# Altium PCB Counter_of_area.PcbDoc
Units mm, origin at the board's own origin, x right, y up, seen from the top; angles counter-clockwise.
Board outline 63 x 62.5 mm, 2 copper layers (Top Layer, Bottom Layer); 28 components, 36 nets, 115 pads, 21 vias.
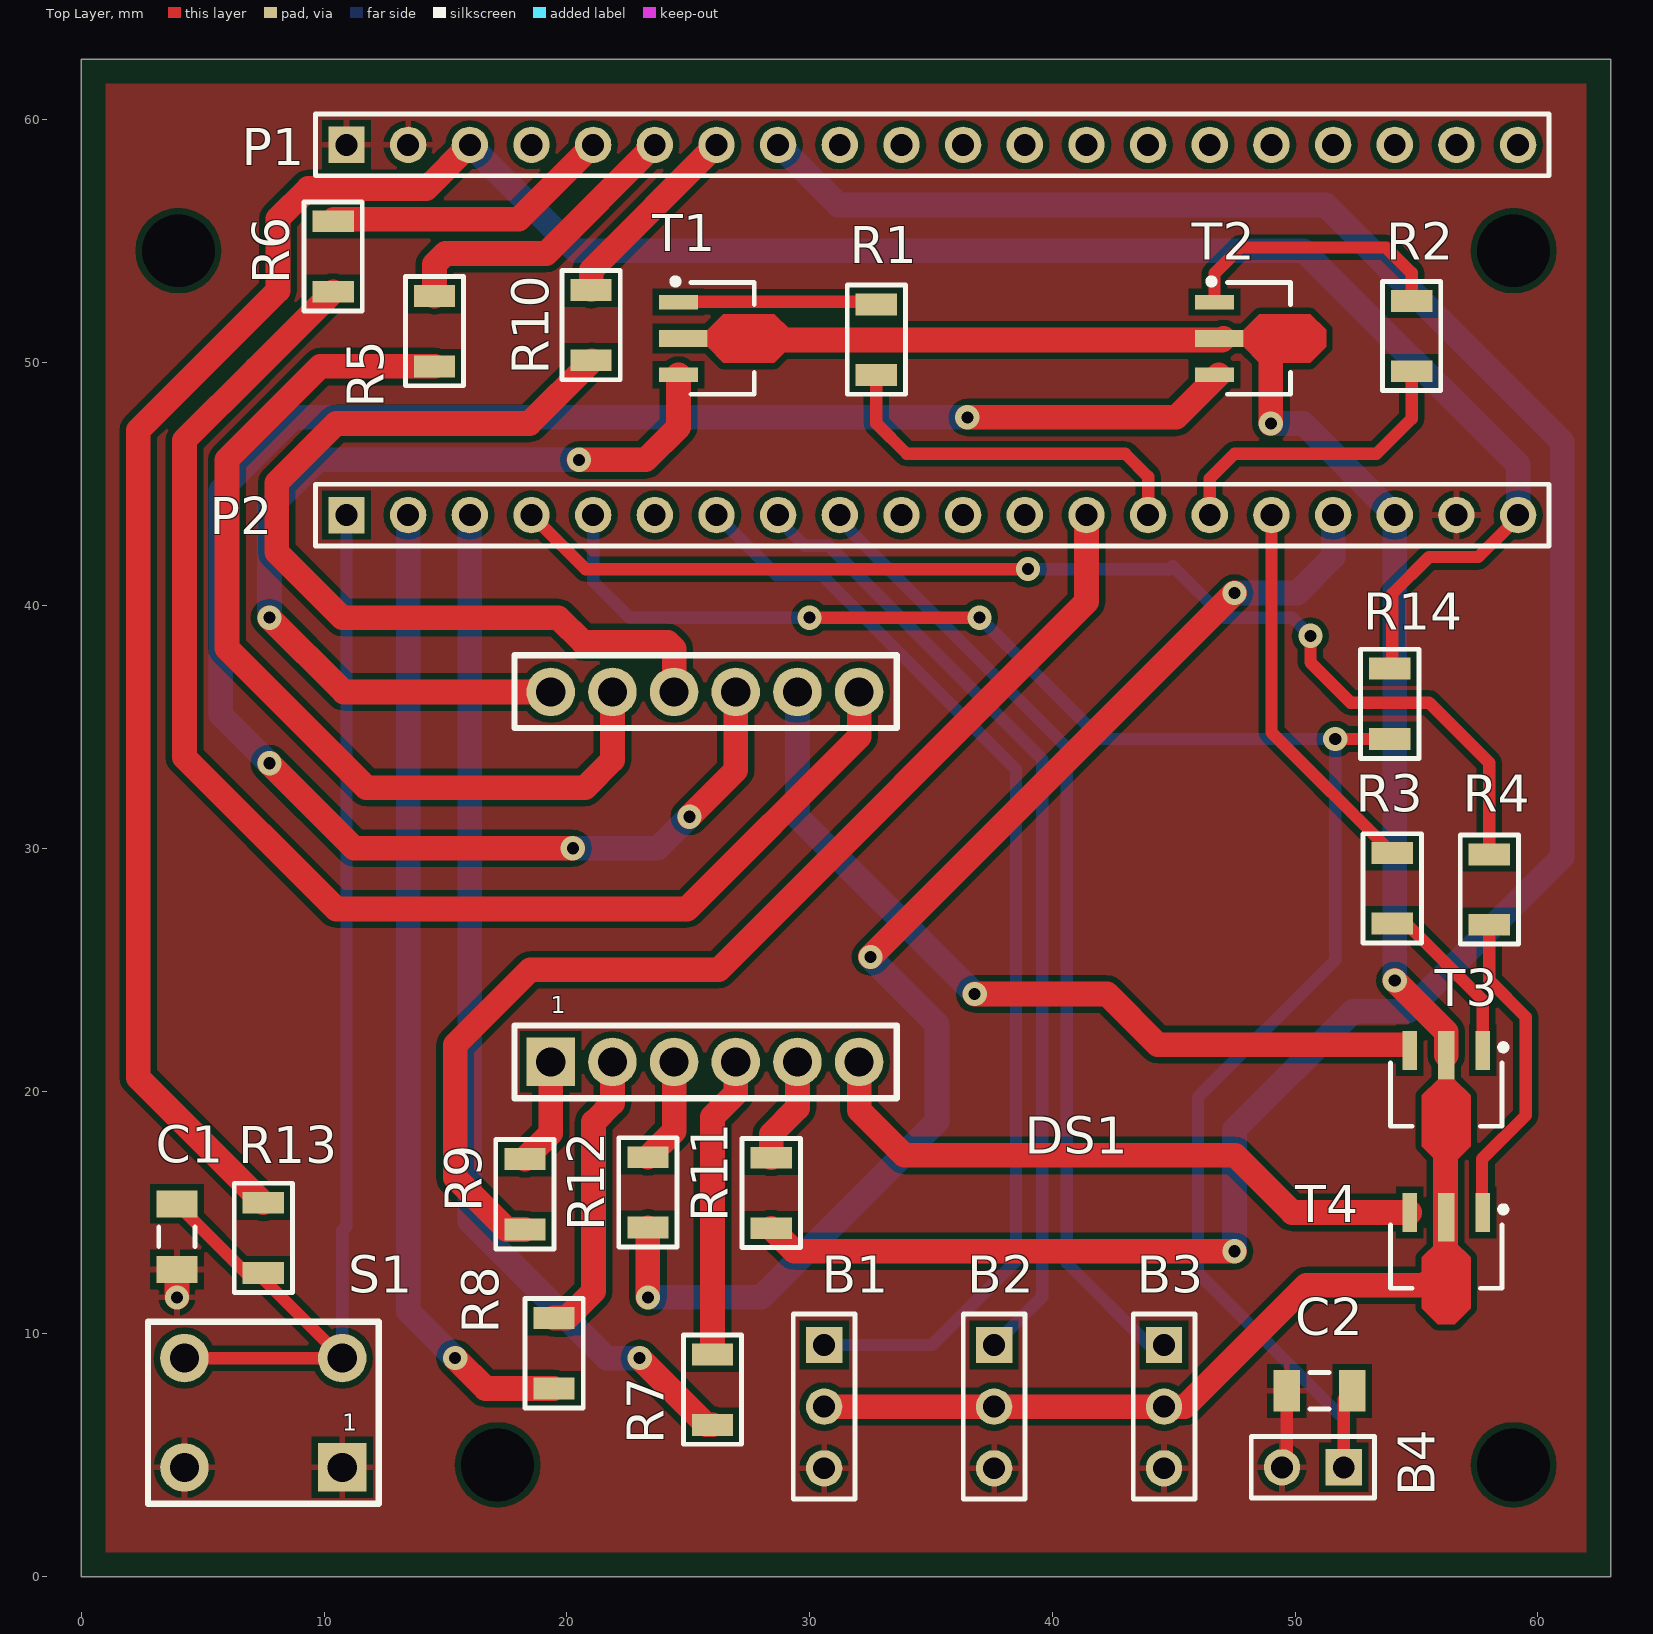
[diagram p0: Top Layer view]
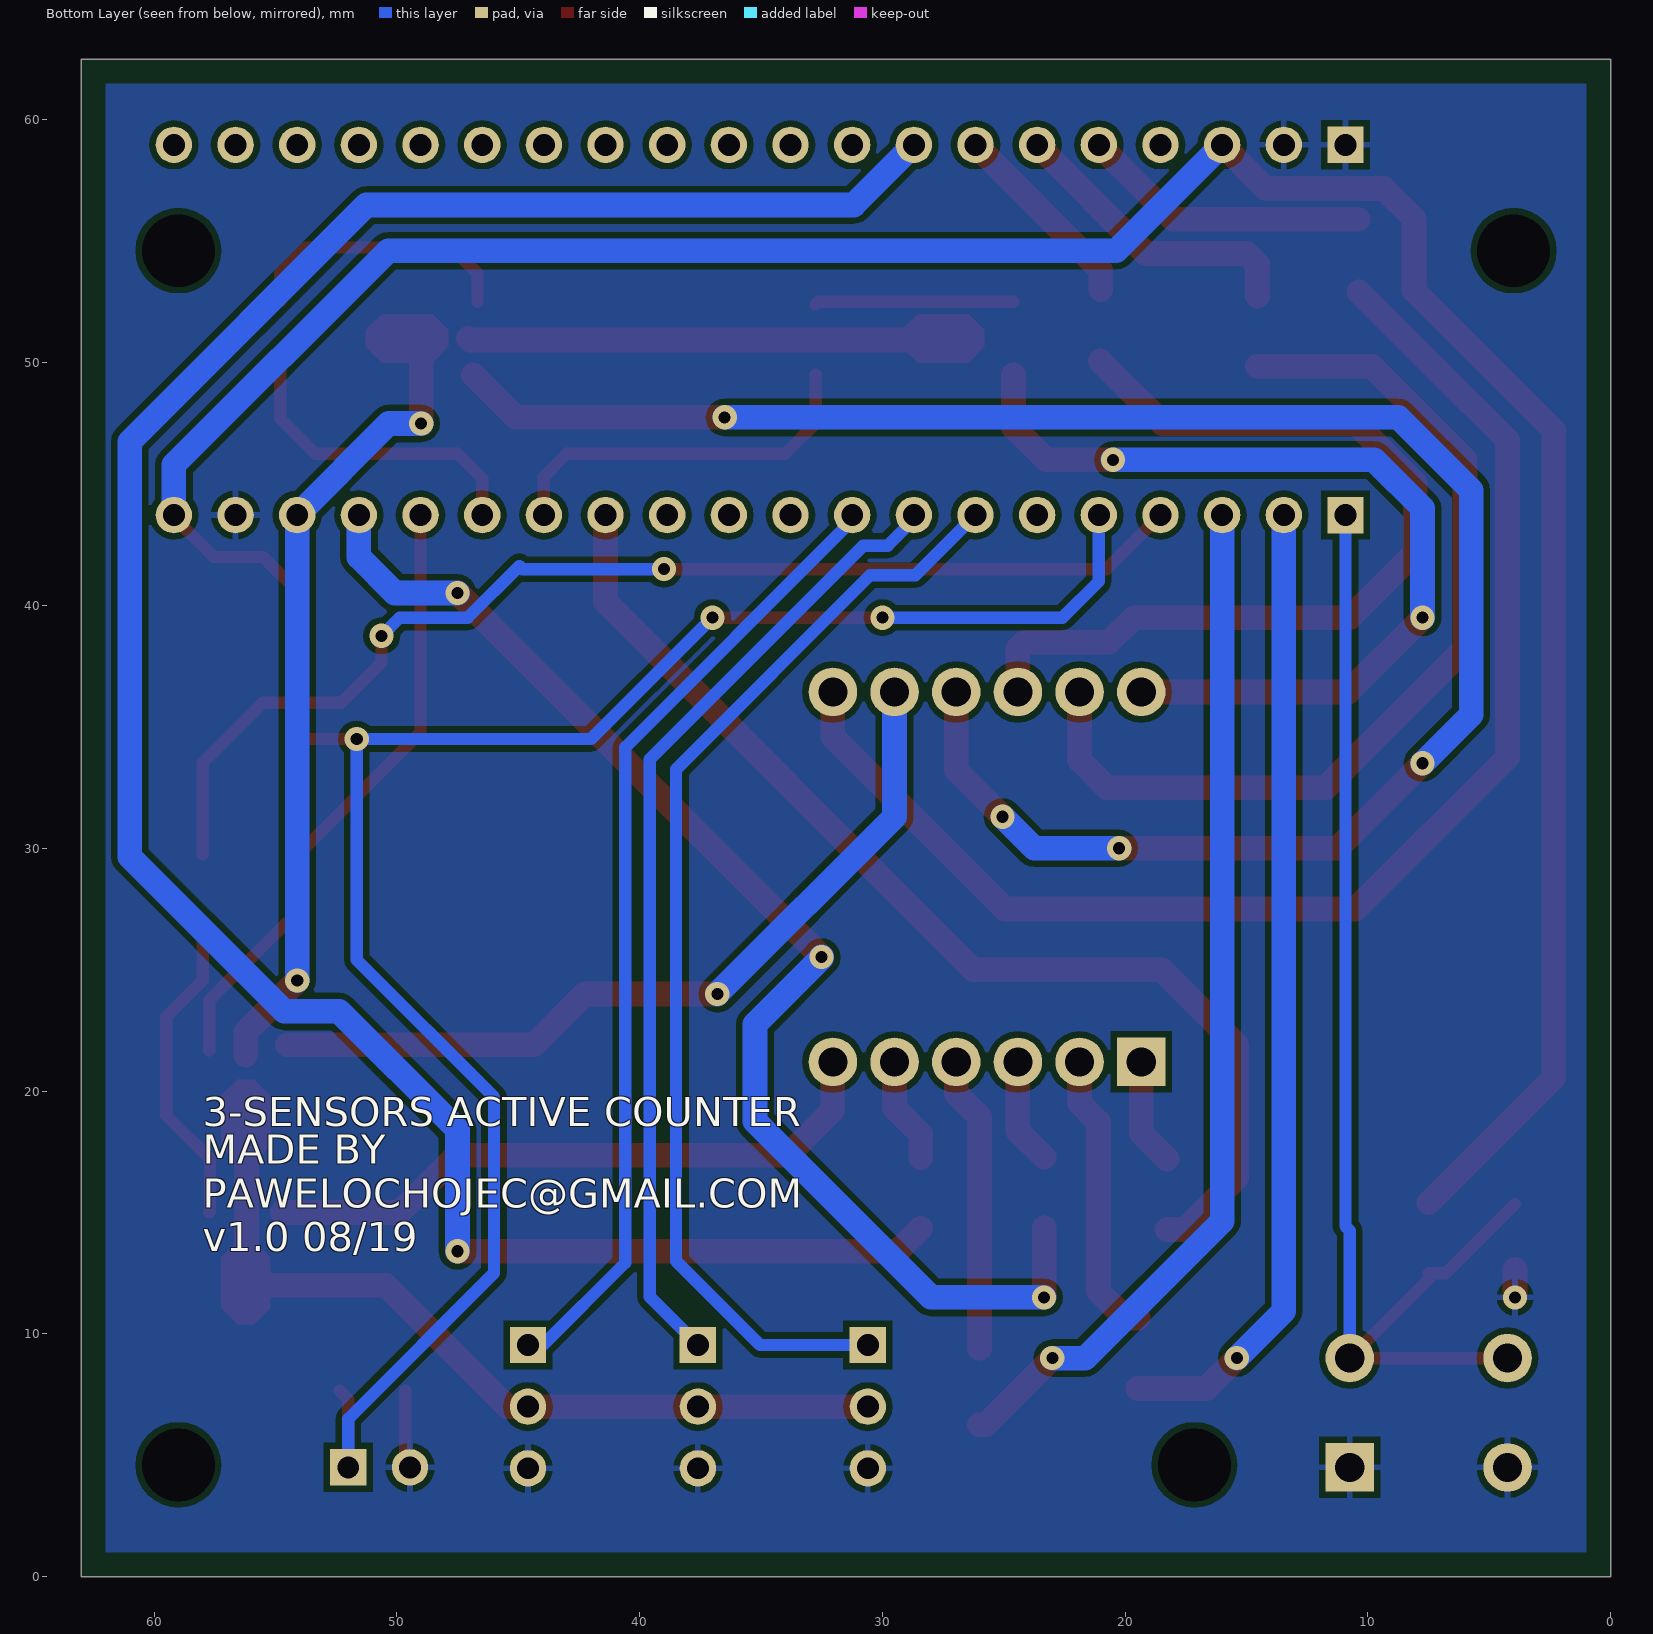
[diagram p1: Bottom Layer view, seen from below]
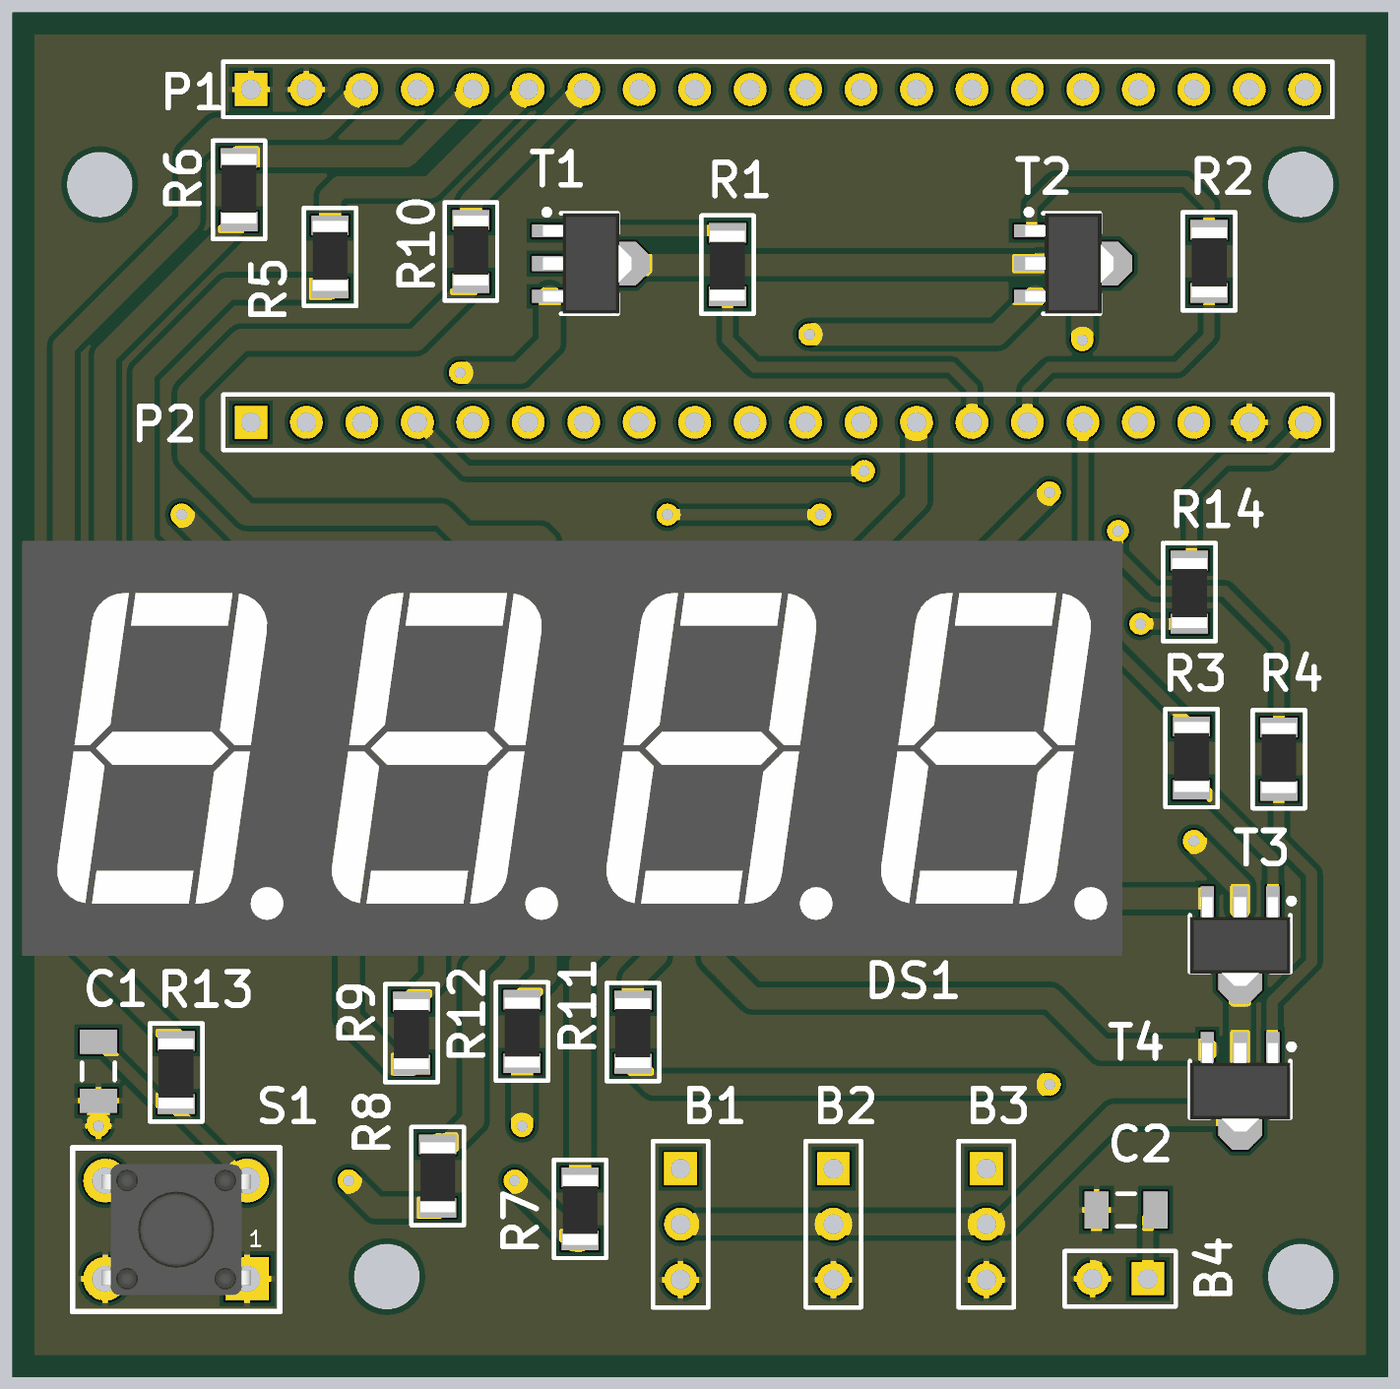
[diagram p2: 3D render of the assembled board from above, using the file's embedded part models]

## Layer stack, top to bottom
Top Solder: solder mask 0.0102, Solder Resist, Dk 3.5
Top Layer: signal copper 0.0356
Dielectric 1: dielectric 0.32, FR-4, Dk 4.8
Bottom Layer: signal copper 0.0356
Bottom Solder: solder mask 0.0102, Solder Resist, Dk 3.5

## Board outline
0,0 63,0 63,62.5 0,62.5

## Design rules (kind name [scope] priority, off if disabled: settings)
Clearance [All] p1: gap=0.254 ignorepadtopadclearanceinfootprint=FALSE except(0: Arc-Hole Track-Hole SMDPad-Hole THPad-Hole Via-Hole Fill-Hole Poly-Hole Region-Hole Text-Hole)
HoleSize [All] p1: absolutevalues=TRUE maxlimit=3.5 minlimit=0.025 maxpercent=80.000 minpercent=20.000
HoleToHoleClearance [All] p1: gap=0.25 allowstackedmicrovias=TRUE
PolygonConnect [All] p1: connectstyle=Relief reliefconductorwidth=0.254 reliefentries=4 polygonreliefangle="90 Angle" airgapwidth=0.254
RoutingVias [All] p1: holewidth=0.711 width=1.27 viastyle="Through Hole" minholewidth=0.711 minwidth=1.27 maxholewidth=0.711 maxwidth=1.27
SilkToSilkClearance [All] p1: silktosilkclearance=0.25
SilkToSolderMaskClearance [IsPad] p1: minsilkscreentomaskgap=0.24 clearancetoexposedcopper=TRUE
SolderMaskExpansion [All] p1: expansion=0.102
Width [All] p1: maxlimit=1.016 minlimit=0.254 preferedwidth=0.508
26 further rules are at their usual default settings.

## Classes and differential pairs
net class seg[1..8]: seg1 seg2 seg3 seg4 seg5 seg6 seg7 seg8
net class K[1..4]: K1 K2 K3 K4
net class digit[1..4]: digit1 digit2 digit3 digit4
net class Base[1..4]: Base1 Base2 Base3 Base4

## Components (designator, comment, footprint, x,y, rotation, side; value= is the part's Value field where it differs from the comment)
B1 "Header 3" HDR1X3 30.6,9.54 r270 top
B2 "Header 3" HDR1X3 37.6,9.54 r270 top
B3 "Header 3" HDR1X3 44.6,9.54 r270 top
B4 "Header 2" HDR1X2 52,4.5 r180 top
C1 "Cap Semi" C1206 3.94,14 r90 top value=100nF
C2 "Cap Semi" C1206 51,7.65 r0 top value=100nF
DS1 "KW4-561AGB" 7SEGMENT4DIGITS 19.34,21.2 r0 top
P1 "Header 20" HDR1X20 10.925,58.975 r0 top
P2 "Header 20" HDR1X20 10.925,43.725 r0 top
R1 "1206 resistor" "RESISTOR 1206" 32.75,51 r90 top
R2 "1206 resistor" "RESISTOR 1206" 54.8,51.15 r90 top
R3 "1206 resistor" "RESISTOR 1206" 54,28.3 r270 top
R4 "1206 resistor" "RESISTOR 1206" 58,28.25 r270 top
R5 "1206 resistor" "RESISTOR 1206" 14.55,51.25 r270 top
R6 "1206 resistor" "RESISTOR 1206" 10.375,54.325 r270 top
R7 "1206 resistor" "RESISTOR 1206" 26,7.75 r90 top
R8 "1206 resistor" "RESISTOR 1206" 19.475,9.25 r90 top
R9 "1206 resistor" "RESISTOR 1206" 18.275,15.8 r90 top
R10 "1206 resistor" "RESISTOR 1206" 21,51.5 r270 top
R11 "1206 resistor" "RESISTOR 1206" 28.42,15.85 r90 top
R12 "1206 resistor" "RESISTOR 1206" 23.34,15.875 r90 top
R13 "1206 resistor" "RESISTOR 1206" 7.5,14 r90 top
R14 "1206 resistor" "RESISTOR 1206" 53.899,36 r90 top
S1 "pushbutton" "TACT SWITCH" 7.25,7 r0 top
T1 "BCX51-16.115" SOT89-150P410X160-3M 26.5,51 r0 top
T2 "BCX51-16.115" SOT89-150P410X160-3M 48.58,51 r0 top
T3 "BCX51-16.115" SOT89-150P410X160-3M 56.225,19.775 r270 top
T4 "BCX51-16.115" SOT89-150P410X160-3M 56.225,13.1 r270 top

## Footprints (in the part's own frame and the unit in brackets; to place one, negate y for a bottom-side part, rotate by r counter-clockwise, add the part's x,y. Pads: shape width x height; smd on the part's side, far side on the other; paste and mask are expansions set on the pad)
7SEGMENT4DIGITS [mm]
  rect 2x2 hole 1.2: 1(0,0)
  round 2 hole 1.2: 2(2.54,0) 3(5.08,0) 4(7.62,0) 5(10.16,0) 6(12.7,0) 7(12.7,15.24) 8(10.16,15.24) 9(7.62,15.24) 10(5.08,15.24) 11(2.54,15.24) 12(0,15.24)
  silkscreen extent -1.5,-1.5 14.25,16.75, body extent -18.9,-1.9 31.5,17.1, height 8
C1206 [mm] "Chip Capacitor, Body 3.2x1.6mm, IPC High Density"
  rect 1.1x1.7 smd: 1(-1.35,0) 2(1.35,0)
  silkscreen extent -0.4,-0.75 0.4,0.75, body extent -1.7,-0.9 1.7,0.9, height 1.3
HDR1X2 [mm] "Connector; Header; 2 Position"
  rect 1.5x1.5 hole 0.9: 1(0,0)
  round 1.5 hole 0.9: 2(2.54,0)
  silkscreen extent -1.27,-1.27 3.81,1.27
HDR1X3 [mm] "Connector; Header; 3 Position"
  rect 1.5x1.5 hole 0.9: 1(0,0)
  round 1.5 hole 0.9: 2(2.54,0) 3(5.08,0)
  silkscreen extent -1.27,-1.27 6.35,1.27
HDR1X20 [mm] "Connector; Header; 20 Position"
  rect 1.5x1.5 hole 0.9: 1(0,0)
  round 1.5 hole 0.9: 2(2.54,0) 3(5.08,0) 4(7.62,0) 5(10.16,0) 6(12.7,0) 7(15.24,0) 8(17.78,0) 9(20.32,0) 10(22.86,0) 11(25.4,0) 12(27.94,0) 13(30.48,0) 14(33.02,0) 15(35.56,0) 16(38.1,0) 17(40.64,0) 18(43.18,0) 19(45.72,0) 20(48.26,0)
  silkscreen extent -1.27,-1.27 49.53,1.27
"RESISTOR 1206" [mm]
  rect 0.9x1.7 smd: 1(-1.5,0) 2(1.4,0)
  silkscreen extent -2.3,-1.2 2.2,1.2, body extent -1.7,-0.8 1.5,0.8, height 0.61
SOT89-150P410X160-3M [mm] "SOT89, 3-Leads, Body 4,50x2,45mm, Pitch 1,50mm, Lead Span 4,1mm, IPC Low Density"
  rect 1.6x0.6 smd: B(-1.9,1.5) E(-1.9,-1.5)
  rect 2x0.7 smd: C(-1.7,0)
  Top Layer region: -0.7,0.35 -0.05,1 2.05,1 2.7,0.35 2.7,-0.35 2.05,-1 -0.05,-1 -0.7,-0.35
  silkscreen extent -2.15,-2.3 1.22,2.47, body extent -2.2,-2.3 1.85,2.3, height 1.6
"TACT SWITCH" [mm] "6x6mm tact switch"
  rect 2x2 hole 1.2: 1(3.5,-2.5)
  round 2 hole 1.2: 2(-3,-2.5) 3(3.5,2) 4(-3,2)
  silkscreen extent -4.5,-4 5,3.5, body extent -3.17,-3.25 3.67,2.75, height 5.01

## Part data
B1 B2 B3: "Header, 3-Pin", LatestRevisionDate=17-Jul-2002, LatestRevisionNote="Re-released for DXP Platform.", Publisher="Altium Limited"
B4: "Header, 2-Pin", LatestRevisionDate=17-Jul-2002, LatestRevisionNote="Re-released for DXP Platform.", Publisher="Altium Limited"
C1 C2: "Capacitor (Semiconductor SIM Model)", LatestRevisionDate=29-May-2009, LatestRevisionNote="IPC-7351 Footprint Added.", PackageDescription="Chip Capacitor", PackageReference=C1206, Published=8-Jun-2000, Publisher="Altium Limited"
DS1: library part FYQ-5641AUHR-21, "7 segment, 4 digit display", Manufacturer=Foryard, Manufacturer Part Number=FYQ-5641AUHR-21, Pricing 1="1=1.32, 5=0.88, 35=0.73, 175=0.64, 630=0.59 (USD)", Stock 1=641, Supplier 1=TME, Supplier Part Number 1=FYQ-5641AUHR-21
P1 P2: "Header, 20-Pin", LatestRevisionDate=17-Jul-2002, LatestRevisionNote="Re-released for DXP Platform.", Publisher="Altium Limited"
R1 R2 R3 R4: library part CRCW1206220RJNTABC, "Resistor: thick film; SMD; 1206; 220O; 0.25W; ±5%; -55÷125°C", Case/Package=1206, Manufacturer=Vishay, Power Rating=250mW, Resistance=1k, Tolerance=5%, Lead Free="Contains Lead", Manufacturer Part Number=CRCW1206220RJNTABC, Pricing 1="100=0.0314, 500=0.01833, 1000=0.01178, 5000=0.005, 15000=0.00487 (USD)", Stock 1=277400, Supplier 1=TME, Supplier Part Number 1=CRCW1206220RJNTABC
R5 R6 R7 R8 R9 R10 R11 R12: library part CRCW1206220RJNTABC, "Resistor: thick film; SMD; 1206; 220O; 0.25W; ±5%; -55÷125°C", Case/Package=1206, Manufacturer=Vishay, Power Rating=250mW, Resistance=220R, Tolerance=5%, Lead Free="Contains Lead", Manufacturer Part Number=CRCW1206220RJNTABC, Pricing 1="100=0.0314, 500=0.01833, 1000=0.01178, 5000=0.005, 15000=0.00487 (USD)", Stock 1=277400, Supplier 1=TME, Supplier Part Number 1=CRCW1206220RJNTABC
R13 R14: library part CRCW1206220RJNTABC, "Resistor: thick film; SMD; 1206; 220O; 0.25W; ±5%; -55÷125°C", Case/Package=1206, Manufacturer=Vishay, Power Rating=250mW, Resistance=10k, Tolerance=5%, Lead Free="Contains Lead", Manufacturer Part Number=CRCW1206220RJNTABC, Pricing 1="100=0.0314, 500=0.01833, 1000=0.01178, 5000=0.005, 15000=0.00487 (USD)", Stock 1=277400, Supplier 1=TME, Supplier Part Number 1=CRCW1206220RJNTABC
S1: library part B3F-1000, "OMRON ELECTRONIC COMPONENTS         B3F-1000             Tactile Switch, Non Illuminated, 24 V, 50 mA, 0.98 N, Solder, B3F Series", Contact Current Rating=50mA, Contact Resistance=100mR, Insulation Resistance=100MR, Manufacturer=Omron, Max Operating Temperature=70°C, Max Voltage Rating (DC)=24V, Min Operating Temperature=-25°C, Operating Force=0.98N, Package Quantity=1500, Actuator Length=0.9mm, Actuator Type=Standard, ComponentLink1Description=http://www.farnell.com/datasheets/2082873.pdf?src-supplier=Newark, ComponentLink1URL=http://www.farnell.com/datasheets/2082873.pdf?src-supplier=Newark, ComponentLink2Description=http://www.farnell.com/datasheets/2082873.pdf?src-supplier=Element14, ComponentLink2URL=http://www.farnell.com/datasheets/2082873.pdf?src-supplier=Element14, ComponentLink3Description=https://omronfs.omron.com/en_US/ecb/products/pdf/en-b3f.pdf?src-supplier=Digi-Key, ComponentLink3URL=https://omronfs.omron.com/en_US/ecb/products/pdf/en-b3f.pdf?src-supplier=Digi-Key, ComponentLink4Description=https://www.distrelec.biz/Web/Downloads/he/et/B3F_eng_datasheet.pdf?mime=application%2Fpdf&src-supplier=Distrelec, ComponentLink4URL=https://www.distrelec.biz/Web/Downloads/he/et/B3F_eng_datasheet.pdf?mime=application%2Fpdf&src-supplier=Distrelec, ComponentLink5Description=http://www.onlinecomponents.com/productFiles/mf-OM/en-b3f.pdf?src-supplier=Onlinecomponents.com, ComponentLink5URL=http://www.onlinecomponents.com/productFiles/mf-OM/en-b3f.pdf?src-supplier=Onlinecomponents.com, ComponentLink6Description=http://www.mouser.com/ds/2/307/B3F_0811-26083.pdf?src-supplier=Mouser, ComponentLink6URL=http://www.mouser.com/ds/2/307/B3F_0811-26083.pdf?src-supplier=Mouser, ComponentLink7Description=http://www.jameco.com/Jameco/Products/ProdDS/162886.pdf?src-supplier=Jameco, ComponentLink7URL=http://www.jameco.com/Jameco/Products/ProdDS/162886.pdf?src-supplier=Jameco, ComponentLink8Description=https://www.alliedelec.com/m/d/0b4640ec13fd80eb1780b1c20343ca8a.pdf?src-supplier=Allied+Electronics, ComponentLink8URL=https://www.alliedelec.com/m/d/0b4640ec13fd80eb1780b1c20343ca8a.pdf?src-supplier=Allied+Electronics, ComponentLink9Description=https://www.verical.com/server-webapp/html/getDatasheet?partID=388862&src-supplier=Verical, ComponentLink9URL=https://www.verical.com/server-webapp/html/getDatasheet?partID=388862&src-supplier=Verical, ComponentLink10Description=http://www.rapidonline.com/pdf/78-0136.pdf?src-supplier=Rapid+Electronics, ComponentLink10URL=http://www.rapidonline.com/pdf/78-0136.pdf?src-supplier=Rapid+Electronics, Contact Material=Gold,Silver, Contact Plating=Gold, Current Rating=50mA, Depth=6mm, Electrical Life=1000000Cycles, Height=3.4mm, Illumination Type=Non-Illuminated,Illuminated, Lead Free="Lead Free", Length=6mm, Manufacturer Part Number=B3F-1000, Max Current Rating=50mA, Mechanical Life=1000000Cycles, Mount="Through Hole", Number of Pins=4, Number of Poles=1, Orientation=Straight, Packaging=Bag, Pricing 1="1=0.1397, 20=0.1319, 100=0.1241, 500=0.1186, 1000=0.11 (USD)", REACH SVHC=Unknown, Stock 1=6551, Supplier 1=TME, Supplier Part Number 1=B3F-1000, Switch Function=Off-Mom, Switch Travel=0.25mm, Termination="PC Pins", Throw Configuration=SPST, Voltage Rating (DC)=24V, Weight=0.008818oz, Width=6mm
T1 T2 T3 T4: "TRANS PNP 400V 0.5A SOT89", Forward Voltage=1.2V, Manufacturer="NXP Semiconductors", Manufacturer Part Number=BCX51-16115, Supplier Part Number 1=771-BCX51-16115, ComponentLink1Description=https://www.diodes.com/assets/Datasheets/2DA1971.pdf?src-supplier=Digi-Key, ComponentLink1URL=https://www.diodes.com/assets/Datasheets/2DA1971.pdf?src-supplier=Digi-Key, ComponentLink2Description=https://www.verical.com/server-webapp/html/getDatasheet?partID=661243&src-supplier=Verical, ComponentLink2URL=https://www.verical.com/server-webapp/html/getDatasheet?partID=661243&src-supplier=Verical, ComponentLink3Description=http://www.mouser.com/ds/2/115/2DA1971-219201.pdf?src-supplier=Mouser, ComponentLink3URL=http://www.mouser.com/ds/2/115/2DA1971-219201.pdf?src-supplier=Mouser, Lead Free="Lead Free", Number of Pins=3, Packaging="Tape and Reel", Polarity=PNP, Pricing 1="1=0.4, 10=0.284, 50=0.284, 100=0.131, 1000=0.1, 2000=0.086, 10000=0.078, 25000=0.073, 50000=0.066, 100000=0.063 (USD)", REACH SVHC="No SVHC", Stock 1=13194, Supplier 1=Mouser

## Free pads (board coordinates)
  round 2.5 hole 3 unplated: ""(4,54.615) ""(17.15,4.6) ""(59,4.6) ""(59,54.615)

## Via types
v1: diameter 1, hole 0.5, Top Layer to Bottom Layer, 21 vias

## Nets (pads, with @x,y where several pads share a name; then routed paths per layer and width w, separated by ;. In a path a pad name is that pad's centre, name@x,y a point inside that pad or via, vN(x,y) a via of type N, cw(c..) or ccw(c..) an arc to the next point about the centre after c; other vN are vias at no path point)
5V: B1.2 B2.2 B3.2 P2.18 T1.C T2.C T3.C T4.C | length 86.9
  Top Layer w1.016: 27.972,51 28.034,50.938 46.988,50.938 T2.C@47.05,51 ; B1.2@30.58,7 B1.2 B2.2 B3.2 45.46,7 50.46,12 55.35,12 56.198,12.847 56.198,19.325 ; v1(49,47.5) 49,50.998 ; v1(54.105,24.553) 56.225,22.433 T3.C
  Bottom Layer w1.016: v1(49,47.5) 50.33,47.5 P2.18 v1(54.105,24.553)
Base1: R1.2 T1.B | length 8.2
  Top Layer w0.508: T1.B 24.6,52.508 32.642,52.508 R1.2
Base2: R2.2 T2.B | length 11.3
  Top Layer w0.508: T2.B 46.68,53.68 47.75,54.75 53.75,54.75 54.8,53.7 R2.2
Base3: R3.2 T3.B | length 7.1
  Top Layer w0.508: R3.2 54.575,26.9 57.725,23.75 T3.B
Base4: R4.2 T4.B | length 13.2
  Top Layer w0.508: T4.B 57.7,15.025 57.7,17.2 59.5,19 59.5,23.053 58,24.553 R4.2
digit1: P2.14 R1.1 | length 15.7
  Top Layer w0.508: R1.1 32.75,47.5 34,46.25 43,46.25 43.945,45.305 P2.14
digit2: P2.15 R2.1 | length 12.8
  Top Layer w0.508: P2.15 46.485,45.235 47.5,46.25 53.355,46.25 54.8,47.695 R2.1
digit3: P2.16 R3.1 | length 16
  Top Layer w0.508: P2.16 49.025,34.775 R3.1
digit4: P2.4 R4.1 | length 48.2
  Top Layer w0.508: P2.4 20.77,41.5 v1(39,41.5) ; v1(50.63,38.75) 50.63,37.65 52.28,36 55.517,36 58,33.517 R4.1
  Bottom Layer w0.508: v1(39,41.5) 44.829,41.5 44.954,41.625 47.079,39.5 49.88,39.5 v1(50.63,38.75)
GND: B1.3 B2.3 B3.3 B4.2 C1.1 C2.1 P1.1 P1.2 P2.19 S1.1 S1.2 | length 4.4
  Top Layer w0.508: B4.2 49.65,4.69 C2.1
  Top Layer w1.016: v1(3.94,11.5) C1.1 ; B1.3@30.54,4.5 B1.3@30.58,4.46
K1: DS1.12 T1.E | length 37.8
  Top Layer w1.016: v1(7.75,39.5) 10.81,36.44 DS1.12 DS1.12@19.315,36.465 ; v1(20.5,46) 23.25,46 24.6,47.35 T1.E
  Bottom Layer w1.016: v1(7.75,39.5) 7.75,44 9.75,46 v1(20.5,46)
K2: DS1.9 T2.E | length 80.4
  Top Layer w1.016: v1(7.75,33.5) 11.25,30 v1(20.25,30) ; v1(25.05,31.3) 26.96,33.21 DS1.9 ; v1(36.5,47.75) 45.1,47.75 T2.E@46.85,49.5
  Bottom Layer w1.016: v1(7.75,33.5) 5.75,35.5 5.75,44.75 8.75,47.75 v1(36.5,47.75) ; v1(20.25,30) 23.75,30 v1(25.05,31.3)
K3: DS1.8 T3.E | length 34
  Top Layer w1.016: v1(36.8,24) 42.25,24 44.337,21.913 T3.E@54.517,21.913
  Bottom Layer w1.016: DS1.8 29.5,31.3 v1(36.8,24)
K4: DS1.6 T4.E | length 26.4
  Top Layer w1.016: DS1.6 32.04,19.21 33.9,17.35 47.525,17.35 49.875,15 T4.E
NetB1_1: B1.1 P2.7 | length 46.3
  Bottom Layer w0.508: P2.7 28.64,41.25 30.5,41.25 38.5,33.25 38.5,13 35.04,9.54 B1.1 B1.1@30.58,9.54
NetB2_1: B2.1 P2.8 | length 40.3
  Bottom Layer w0.508: P2.8 29,43.725 29,43.25 29.783,42.467 30.783,42.467 39.58,33.67 39.58,11.52 B2.1
NetB3_1: B3.1 P2.9 | length 40.2
  Bottom Layer w0.508: P2.9 31.5,43.725 31.5,43.25 40.593,34.157 40.593,12.927 43.98,9.54 B3.1
NetDS1_1: DS1.1 R9.2 | length 4.4
  Top Layer w1.016: R9.2 19.34,18.265 DS1.1
NetDS1_2: DS1.2 R8.2 | length 11.9
  Top Layer w1.016: R8.2 20.002,10.65 21.102,11.75 21.102,18.722 21.88,19.5 DS1.2
NetDS1_3: DS1.3 R12.2 | length 4.4
  Top Layer w1.016: R12.2 24.42,18.355 DS1.3
NetDS1_4: DS1.4 R7.2 | length 12.2
  Top Layer w1.016: R7.2@26,9.4 26,18.94 26.96,19.9 DS1.4
NetDS1_5: DS1.5 R11.2 | length 4.4
  Top Layer w1.016: R11.2 28.42,18.22 29.5,19.3 DS1.5
NetDS1_7: DS1.7 R6.2 | length 56.9
  Top Layer w1.016: R6.2 7.2,49.75 4.25,46.8 4.25,33.75 10.5,27.5 24.95,27.5 32.04,34.59 DS1.7
NetDS1_10: DS1.10 R10.2 | length 38.1
  Top Layer w1.016: R10.2@21.031,50.069 18.462,47.5 10.5,47.5 8.055,45.055 8.055,42.195 10.75,39.5 19.653,39.5 20.669,38.484 24.161,38.484 24.42,38.225 DS1.10 DS1.10@24.161,36.699
NetDS1_11: DS1.11 R5.2 | length 39.4
  Top Layer w1.016: R5.2 9.85,49.85 6,46 6,38.25 11.75,32.5 20.75,32.5 21.88,33.63 DS1.11
"position signal": B4.1 C2.2 P2.5 R14.1 | length 76.4
  Top Layer w0.508: v1(30,39.5) v1(37,39.5) ; v1(51.655,34.5) R14.1 ; B4.1 52,7.3 C2.2
  Bottom Layer w0.508: P2.5 21.085,41 22.585,39.5 v1(30,39.5) ; v1(37,39.5) 42,34.5 v1(51.655,34.5) 51.655,25.405 46,19.75 46,12.5 52,6.5 B4.1
pushbutton: C1.2 P2.1 R13.1 S1.3 S1.4 | length 50.9
  Top Layer w0.508: C1.2 6.79,12.5 R13.1 7.5,12.25 S1.3 S1.4
  Bottom Layer w0.508: S1.3 10.75,14.25 10.925,14.425 P2.1
seg1: P1.6 R5.1 | length 12.4
  Top Layer w1.016: R5.1 14.55,54.05 15,54.5 19.15,54.5 P1.6
seg2: P1.5 R6.1 | length 12
  Top Layer w1.016: R6.1@10.405,55.905 18.015,55.905 P1.5
seg3: P2.3 R7.1 | length 42.6
  Top Layer w1.016: v1(23,9) 25.75,6.25 R7.1
  Bottom Layer w1.016: P2.3 16.005,14.645 21.65,9 v1(23,9)
seg4: P2.2 R8.1 | length 40.1
  Top Layer w1.016: v1(15.4,9) 16.65,7.75 R8.1
  Bottom Layer w1.016: P2.2 13.465,11.699 13.465,10.935 v1(15.4,9)
seg5: P2.13 R9.1 | length 46.4
  Top Layer w1.016: R9.1 17.53,14.3 15.4,16.43 15.4,21.9 18.5,25 26.25,25 41.405,40.155 P2.13
seg6: P1.7 R10.1 | length 8.1
  Top Layer w1.016: R10.1 21,53.81 P1.7
seg7: P1.8 R11.1 | length 97.1
  Top Layer w1.016: R11.1 29.37,13.4 v1(47.5,13.4)
  Bottom Layer w1.016: P1.8 31.18,56.5 51.25,56.5 61,46.75 61,29.652 54.631,23.283 52.383,23.283 47.5,18.4 v1(47.5,13.4)
seg8: P2.17 R12.1 | length 53.3
  Top Layer w1.016: v1(23.34,11.5) R12.1 ; v1(32.509,25.525) v1(47.5,40.516)
  Bottom Layer w1.016: v1(23.34,11.5) 28,11.5 35.25,18.75 35.25,22.75 32.509,25.491 v1(32.509,25.525) ; v1(47.5,40.516) 50.081,40.516 51.565,42 P2.17
VCC: P1.3 P2.20 R13.2 R14.2 | length 114.8
  Top Layer w0.508: R14.2@54,37.39 54,40.483 55.517,42 57.545,42 58.846,43.301 59.185,43.301 P2.20
  Top Layer w1.016: R13.2 2.35,20.55 2.35,47.223 8.1,52.973 8.1,55.928 9.347,57.175 14.205,57.175 P1.3
  Bottom Layer w1.016: P1.3 20.365,54.615 50.36,54.615 59.185,45.79 P2.20
pads on no net: P1.4 P1.9 P1.10 P1.11 P1.12 P1.13 P1.14 P1.15 P1.16 P1.17 P1.18 P1.19 P1.20 P2.6 P2.10 P2.11 P2.12

## Polygon pours and split planes (outlines as drawn)
GND on Bottom Layer "Bottom Layer-GND" (solid, remove dead copper, pour order 16): 62,1 62,61.5 1,61.5 1,1
GND on Top Layer "Top Layer-GND" (solid, remove dead copper, pour order 18): 1,1 62,1 62,61.5 1,61.5

## Silkscreen, mask and mechanical layers (free items; w line width, h text height)
Bottom Overlay:
  text "3-SENSORS ACTIVE COUNTER" at 58,18.553 h1.2
  text "MADE BY  / PAWELOCHOJEC@GMAIL.COM / v1.0 08/19" at 58,13.4 h1.2
Board Outline:
  the board outline again, w0.254
Drill Drawing:
  lines w0.254: 0,0 0,62.5 ; 0,0 0,62.5 ; 0,0 63,0 63,62.5 0,62.5

## Text inside footprints (layer, text, board x,y; h text height)
DS1: Top Overlay "1" at 19.34,23.2 h0.7
S1: Top Overlay "1" at 10.75,6 h0.7